# EAGLE board QlockToo (EAGLE 6.3)
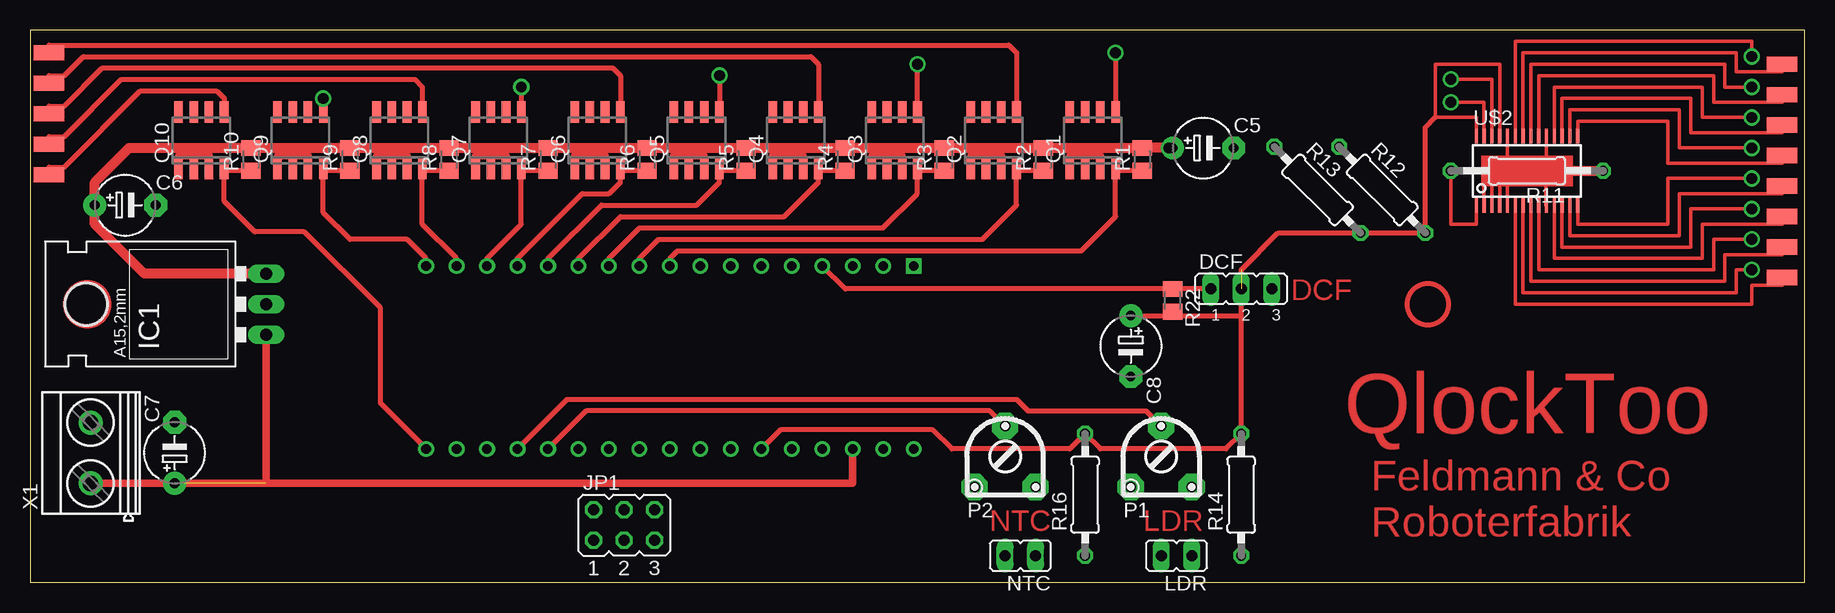
[diagram p0: board, top side]
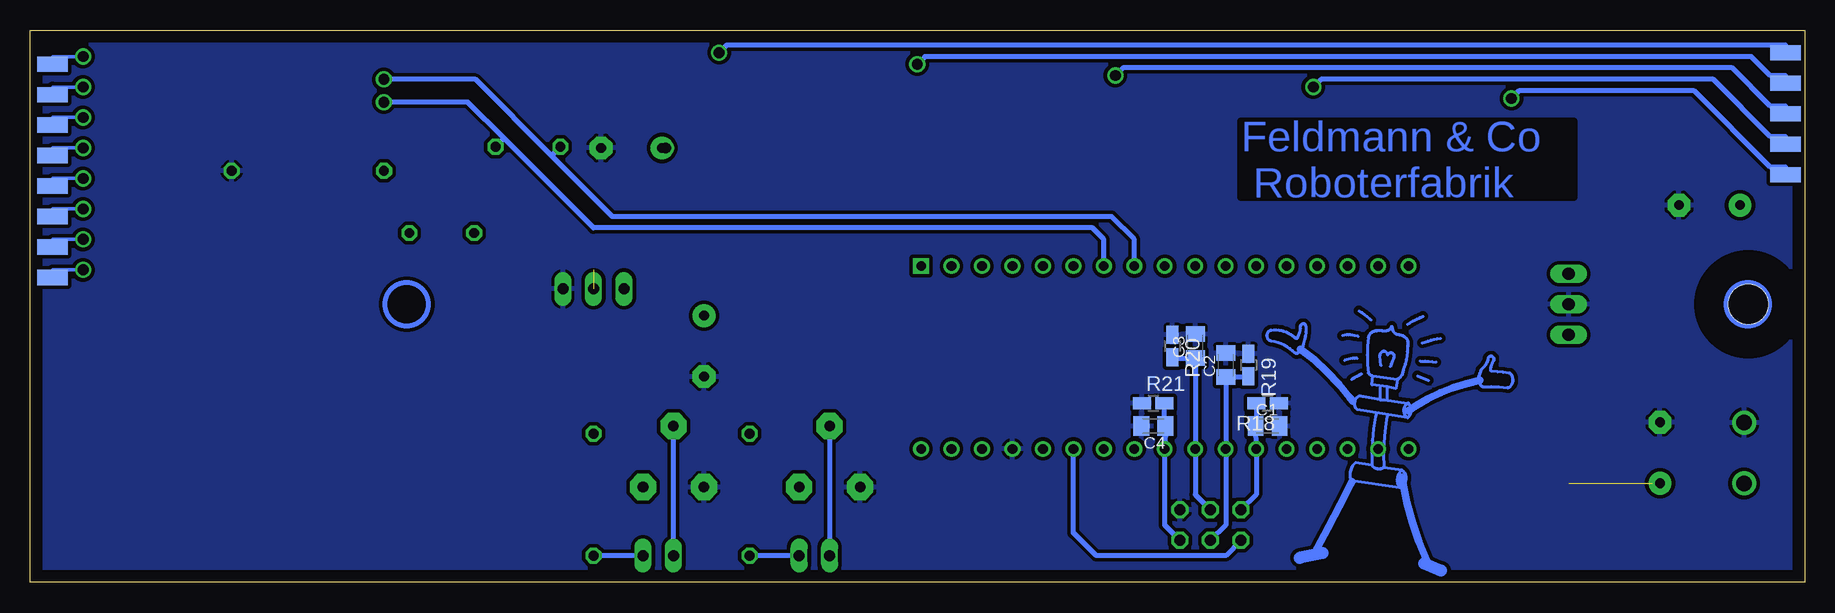
[diagram p1: board, bottom side, seen from below]

Size 147.94 x 46.02 mm. Coordinates in mm from the lower left corner, seen from the top.
Outline: 0,0 147.94,0 147.94,46.02 0,46.02 0,0
Copper layers (1*16): Top 0.035mm / dielectric 1.5mm / Bottom 0.035mm
Design rules "default": minimum track width 10mil, minimum drill 24mil, track to track 8mil, track to pad 8mil, pad to pad 8mil, via to via 8mil, smd to smd 8mil, copper to edge 40mil, drill to drill 8mil, minimum pad ring 10mil, minimum via ring 8mil, stop-mask expansion 4mil, vias tented up to drill 0mil, thermal gap 10mil

## Footprints (pad centres in the part's own frame; a part is rotated, then mirrored left to right if it is on the bottom)
C0805K = smd 1.3 x 1.6: 1 -1,0; 2 1,0
E5-5 = drill 0.813 pad 1.905: + -2.54,0 | drill 0.813 pad 1.905 octagon: - 2.54,0
JP2 = drill 0.914 long: 1 -2.54,0; 2 0,0; 3 2.54,0
78XXL = drill 1.016 long: GND 0,-3.81; IN -2.54,-3.81; OUT 2.54,-3.81 | hole 3.302: 0,11.176
JP3Q = drill 0.914 octagon: 1 -2.54,-1.27; 2 -2.54,1.27; 3 0,-1.27; 4 0,1.27; 5 2.54,-1.27; 6 2.54,1.27
JP1 = drill 0.914 long: 1 0,-1.27; 2 0,1.27
PT08N = drill 0.889 pad 2.184 octagon: 1 -2.54,-2.54; 2 2.54,-2.54; 3 0,2.54
SO08 = smd 0.72 x 1.78: 1 -1.905,-2.35; 2 -0.635,-2.35; 3 0.635,-2.35; 4 1.905,-2.35; 5 1.905,2.35; 6 0.635,2.35; 7 -0.635,2.35; 8 -1.905,2.35
M0805 = smd 1.3 x 1.6: 1 -0.95,0; 2 0.95,0
0207/12 = drill 0.813 octagon: 1 -6.35,0; 2 6.35,0
0207/10 = drill 0.813 octagon: 1 -5.08,0; 2 5.08,0
R0805W = smd 1.5 x 1: 1 -0.94,0; 2 0.94,0
ARDUINO_MICRO = drill 0.8 square: P$1 0,0 | drill 0.8: P$2 0,-2.54; P$3 0,-5.08; P$4 0,-7.62; P$5 0,-10.16; P$6 0,-12.7; P$7 0,-15.24; P$8 0,-17.78; P$9 0,-20.32; P$10 0,-22.86; P$11 0,-25.4; P$12 0,-27.94; P$13 0,-30.48; P$14 0,-33.02; P$15 0,-35.56; P$16 0,-38.1; P$17 0,-40.64; P$18 15.24,0; P$19 15.24,-2.54; P$20 15.24,-5.08; P$21 15.24,-7.62; P$22 15.24,-10.16; P$23 15.24,-12.7; P$24 15.24,-15.24; P$25 15.24,-17.78; P$26 15.24,-20.32; P$27 15.24,-22.86; P$28 15.24,-25.4; P$29 15.24,-27.94; P$30 15.24,-30.48; P$31 15.24,-33.02; P$32 15.24,-35.56; P$33 15.24,-38.1; P$34 15.24,-40.64
HTSSOP28PWP = smd 0.27 x 1.2: 1 -4.225,-2.9; 2 -3.575,-2.9; 3 -2.925,-2.9; 4 -2.275,-2.9; 5 -1.625,-2.9; 6 -0.975,-2.9; 7 -0.325,-2.9; 8 0.325,-2.9; 9 0.975,-2.9; 10 1.625,-2.9; 11 2.275,-2.9; 12 2.925,-2.9; 13 3.575,-2.9; 14 4.225,-2.9; 15 4.225,2.9; 16 3.575,2.9; 17 2.925,2.9; 18 2.275,2.9; 19 1.625,2.9; 20 0.975,2.9; 21 0.325,2.9; 22 -0.325,2.9; 23 -0.975,2.9; 24 -1.625,2.9; 25 -2.275,2.9; 26 -2.925,2.9; 27 -3.575,2.9; 28 -4.225,2.9
STIFTLEISTE_2.54_SINGLEPIN = smd 1.27 x 2.54: P$1 0,0
MKDSN1,5/2-5,08 = drill 1.3 pad 2: 1 -2.561,0.025; 2 2.519,0.025

## Placement (x,y rotation side)
C1  [C0805K]  44.77,13.02 0 bottom
C2  [C0805K]  48.26,18.1 90 bottom
C3  [C0805K]  50.8,19.68 90 bottom
C4  [C0805K]  54.29,13.02 180 bottom
C5  [E5-5]  97.79,36.2 0 top
C6  [E5-5]  7.94,31.43 0 top
C7  [E5-5]  12.06,10.79 90 top
C8  [E5-5]  91.76,19.68 270 top
DCF  [JP2]  100.97,24.45 0 top
IC1  [78XXL]  15.88,23.18 90 top
JP1  [JP3Q]  49.53,4.76 0 top
LDR  [JP1]  95.57,2.22 90 top
NTC  [JP1]  82.55,2.22 90 top
P1  [PT08N]  94.3,10.48 0 top
P2  [PT08N]  81.28,10.48 0 top
Q1  IFR7416  [SO08]  88.58,36.83 0 top
Q2  IFR7416  [SO08]  80.33,36.83 0 top
Q3  IFR7416  [SO08]  72.07,36.83 0 top
Q4  IFR7416  [SO08]  63.82,36.83 0 top
Q5  IFR7416  [SO08]  55.56,36.83 0 top
Q6  IFR7416  [SO08]  47.31,36.83 0 top
Q7  IFR7416  [SO08]  39.05,36.83 0 top
Q8  IFR7416  [SO08]  30.8,36.83 0 top
Q9  IFR7416  [SO08]  22.54,36.83 0 top
Q10  IFR7416  [SO08]  14.29,36.83 0 top
R1  [M0805]  92.71,35.24 90 top
R2  [M0805]  84.45,35.24 90 top
R3  [M0805]  76.2,35.24 90 top
R4  [M0805]  67.94,35.24 90 top
R5  [M0805]  59.69,35.24 90 top
R6  [M0805]  51.44,35.24 90 top
R7  [M0805]  43.18,35.24 90 top
R8  [M0805]  34.92,35.24 90 top
R9  [M0805]  26.67,35.24 90 top
R10  [M0805]  18.41,35.24 90 top
R11  [0207/12]  124.78,34.29 180 top
R12  [0207/10]  112.71,32.7 315 top
R13  [0207/10]  107.31,32.7 315 top
R14  [0207/10]  100.97,7.3 90 top
R16  [0207/10]  87.95,7.3 90 top
R18  [R0805W]  44.77,14.92 180 bottom
R19  [R0805W]  46.35,18.1 270 bottom
R20  [R0805W]  52.7,19.68 270 bottom
R21  [R0805W]  54.29,14.92 0 bottom
R22  [M0805]  95.25,23.5 270 top
U$1  ARDUINO_MICRO  [ARDUINO_MICRO]  73.66,26.35 270 top
U$2  TLC59116  [HTSSOP28PWP]  124.78,34.29 0 top
U$3  STIFTLEISTE_2.54_SINGLEPIN  [STIFTLEISTE_2.54_SINGLEPIN]  146.05,25.4 270 top
U$4  STIFTLEISTE_2.54_SINGLEPIN  [STIFTLEISTE_2.54_SINGLEPIN]  146.05,25.4 270 bottom
U$5  STIFTLEISTE_2.54_SINGLEPIN  [STIFTLEISTE_2.54_SINGLEPIN]  146.05,27.94 270 top
U$6  STIFTLEISTE_2.54_SINGLEPIN  [STIFTLEISTE_2.54_SINGLEPIN]  146.05,27.94 270 bottom
U$7  STIFTLEISTE_2.54_SINGLEPIN  [STIFTLEISTE_2.54_SINGLEPIN]  146.05,30.48 270 top
U$8  STIFTLEISTE_2.54_SINGLEPIN  [STIFTLEISTE_2.54_SINGLEPIN]  146.05,30.48 270 bottom
U$9  STIFTLEISTE_2.54_SINGLEPIN  [STIFTLEISTE_2.54_SINGLEPIN]  146.05,33.02 270 top
U$10  STIFTLEISTE_2.54_SINGLEPIN  [STIFTLEISTE_2.54_SINGLEPIN]  146.05,33.02 270 bottom
U$11  STIFTLEISTE_2.54_SINGLEPIN  [STIFTLEISTE_2.54_SINGLEPIN]  146.05,35.56 270 top
U$12  STIFTLEISTE_2.54_SINGLEPIN  [STIFTLEISTE_2.54_SINGLEPIN]  146.05,35.56 270 bottom
U$13  STIFTLEISTE_2.54_SINGLEPIN  [STIFTLEISTE_2.54_SINGLEPIN]  146.05,38.1 90 top
U$14  STIFTLEISTE_2.54_SINGLEPIN  [STIFTLEISTE_2.54_SINGLEPIN]  146.05,38.1 270 bottom
U$15  STIFTLEISTE_2.54_SINGLEPIN  [STIFTLEISTE_2.54_SINGLEPIN]  146.05,40.64 90 top
U$16  STIFTLEISTE_2.54_SINGLEPIN  [STIFTLEISTE_2.54_SINGLEPIN]  146.05,40.64 270 bottom
U$17  STIFTLEISTE_2.54_SINGLEPIN  [STIFTLEISTE_2.54_SINGLEPIN]  146.05,43.18 270 top
U$18  STIFTLEISTE_2.54_SINGLEPIN  [STIFTLEISTE_2.54_SINGLEPIN]  146.05,43.18 270 bottom
U$19  STIFTLEISTE_2.54_SINGLEPIN  [STIFTLEISTE_2.54_SINGLEPIN]  1.59,44.13 270 bottom
U$20  STIFTLEISTE_2.54_SINGLEPIN  [STIFTLEISTE_2.54_SINGLEPIN]  1.59,44.13 90 top
U$21  STIFTLEISTE_2.54_SINGLEPIN  [STIFTLEISTE_2.54_SINGLEPIN]  1.59,41.59 270 bottom
U$22  STIFTLEISTE_2.54_SINGLEPIN  [STIFTLEISTE_2.54_SINGLEPIN]  1.59,41.59 90 top
U$23  STIFTLEISTE_2.54_SINGLEPIN  [STIFTLEISTE_2.54_SINGLEPIN]  1.59,39.05 270 bottom
U$24  STIFTLEISTE_2.54_SINGLEPIN  [STIFTLEISTE_2.54_SINGLEPIN]  1.59,39.05 90 top
U$25  STIFTLEISTE_2.54_SINGLEPIN  [STIFTLEISTE_2.54_SINGLEPIN]  1.59,36.51 270 bottom
U$26  STIFTLEISTE_2.54_SINGLEPIN  [STIFTLEISTE_2.54_SINGLEPIN]  1.59,36.51 90 top
U$27  STIFTLEISTE_2.54_SINGLEPIN  [STIFTLEISTE_2.54_SINGLEPIN]  1.59,33.97 270 bottom
U$28  STIFTLEISTE_2.54_SINGLEPIN  [STIFTLEISTE_2.54_SINGLEPIN]  1.59,33.97 90 top
U$37  HELFERLEIN01  [HELFERLEIN01]  35.24,20.64 0 bottom
X1  MKDSN1,5/2-5,08  [MKDSN1,5/2-5,08]  5.08,10.79 90 top

## Library data of the parts
C1-C8 R1-R14 R16 R18-R22 = resistor
DCF JP1 LDR NTC = jumper
IC1 = SparkFun
P1 P2 = divers
Q1-Q10 = ir
U$1-U$28 U$37 = bastian
X1 = con-phoenix-508; MPN: MKDSN 1,5/2-5.08; OC_FARNELL: 1792903; OC_NEWARK: 30M2397

## Nets
+5V: C8.+ DCF.2 JP1.1 R12.2 R13.2 R14.2 R16.2 R22.2 U$1.P$23 U$2.25 U$2.28
E0: Q1.4 R1.1 U$1.P$9
E1: Q2.4 R2.1 U$1.P$10
E2: Q3.4 R3.1 U$1.P$11
E3: Q4.4 R4.1 U$1.P$12
E4: Q5.4 R5.1 U$1.P$13
E5: Q6.4 R6.1 U$1.P$14
E6: Q7.4 R7.1 U$1.P$15
E7: Q8.4 R8.1 U$1.P$16
E8: Q9.4 R9.1 U$1.P$17
E9: Q10.4 R10.1 U$1.P$34
GND: C1.2 C2.2 C3.2 C4.2 C5.- C6.- C7.- C8.- DCF.3 IC1.GND JP1.6 P1.1 P2.1 R11.1 R18.1 R19.1 R20.1 R21.1 U$1.P$21 U$2.2 U$2.3 U$2.4 U$2.5 U$2.10 U$2.19 U$2.24 X1.2
INT2: DCF.1 R22.1 U$1.P$4
INT3: U$1.P$3
LDR: LDR.2 P1.3 U$1.P$31
N$1: LDR.1 R14.1
N$2: Q1.5 U$19.P$1
N$3: C5.+ C6.+ IC1.OUT Q1.1 Q2.1 Q3.1 Q4.1 Q5.1 Q6.1 Q7.1 Q8.1 Q9.1 Q10.1 R1.2 R2.2 R3.2 R4.2 R5.2 R6.2 R7.2 R8.2 R9.2 R10.2
N$4: C7.+ IC1.IN U$1.P$20 X1.1
N$6: U$2.20 U$15.P$1
N$7: Q8.5 U$26.P$1
N$13: R11.2 U$2.1
N$15: NTC.1 R16.1
N$16: U$2.6 U$3.P$1
N$17: U$2.7 U$4.P$1
N$18: U$2.8 U$5.P$1
N$19: U$2.9 U$6.P$1
N$20: U$2.11 U$7.P$1
N$21: U$2.12 U$8.P$1
N$22: U$2.13 U$9.P$1
N$23: U$2.14 U$10.P$1
N$24: U$2.15 U$11.P$1
N$25: U$2.16 U$12.P$1
N$26: U$2.17 U$13.P$1
N$27: U$2.18 U$14.P$1
N$29: U$2.21 U$16.P$1
N$30: U$2.22 U$17.P$1
N$31: U$2.23 U$18.P$1
N$33: Q10.5 U$28.P$1
N$34: Q9.5 U$27.P$1
N$36: Q7.5 U$25.P$1
N$37: Q6.5 U$24.P$1
N$38: Q5.5 U$23.P$1
N$39: Q4.5 U$22.P$1
N$40: Q3.5 U$21.P$1
N$41: Q2.5 U$20.P$1
S1: C1.1 JP1.2 R18.2 U$1.P$29
S2: C2.1 JP1.3 R19.2 U$1.P$28
S3: C3.1 JP1.4 R20.2 U$1.P$27
S4: C4.1 JP1.5 R21.2 U$1.P$26
SCL: R13.1 U$1.P$8 U$2.26
SDA: R12.1 U$1.P$7 U$2.27
THERMO: NTC.2 P2.3 U$1.P$30

## Tracks (layer width: path | path; a pad name or v marks a point on that pad's centre or on a via)
+5V  (1 unrouted)
  Top 0.305: U$2.25 122.5,43.18 117.16,43.18 117.16,38.73 120.55,38.73 U$2.28
  Top 0.406: 117.16,38.73 116.31,37.88 R12.2 R13.2 104.04,29.11 100.97,26.04 100.97,22.23 | 100.97,22.23 R14.2 99.69,11.11 89.22,11.11 R16.2 86.68,11.11 76.83,11.11 75.25,12.7 62.55,12.7 U$1.P$23 | 100.97,22.23 95.57,22.23 R22.2 94.94,22.55 94.61,22.23 C8.+
  Bottom 0.406: JP1.1 48.26,2.22 59.05,2.22 60.96,4.13 U$1.P$23
E0
  Top 0.406: R1.1 90.67,34.29 Q1.4 90.49,30.48 87.63,27.62 53.98,27.62 53.34,26.99 U$1.P$9
E1
  Top 0.406: R2.1 82.42,34.29 Q2.4 82.23,31.43 79.38,28.57 52.39,28.57 50.8,26.99 U$1.P$10
E2
  Top 0.406: R3.1 74.17,34.29 Q3.4 73.98,32.38 71.12,29.53 50.8,29.53 48.26,26.99 U$1.P$11
E3
  Top 0.406: R4.1 65.91,34.29 Q4.4 65.72,33.34 62.87,30.48 49.21,30.48 45.72,26.99 U$1.P$12
E4
  Top 0.406: R5.1 57.66,34.29 Q5.4 57.47,33.34 55.56,31.43 47.62,31.43 43.18,26.99 U$1.P$13
E5
  Top 0.406: R6.1 49.4,34.29 Q6.4 49.21,33.34 48.26,32.38 46.04,32.38 40.64,26.99 U$1.P$14
E6
  Top 0.406: R7.1 41.15,34.29 Q7.4 40.96,29.84 38.1,26.99 U$1.P$15
E7
  Top 0.406: R8.1 32.89,34.29 Q8.4 32.7,29.84 35.56,26.99 U$1.P$16
E8
  Top 0.406: R9.1 24.64,34.29 Q9.4 24.45,30.8 26.67,28.57 31.43,28.57 33.02,26.99 U$1.P$17
E9
  Top 0.406: R10.1 16.38,34.29 Q10.4 16.19,31.75 18.73,29.21 22.86,29.21 29.21,22.86 29.21,14.92 U$1.P$34
GND
  Top 0.305: U$2.2 121.2,34.29 121.85,34.29 | 121.85,34.29 122.5,34.29 | 122.5,34.29 123.15,34.29 | 123.15,34.29 126.36,34.29 | 126.36,34.29 126.36,31.39 U$2.10 | U$2.3 121.85,34.29 | U$2.4 122.5,34.29 | U$2.5 123.15,34.29 | U$2.24 123.15,34.29 | U$2.19 126.4,34.29 126.36,34.29
  Top 0.813: 126.36,34.29 R11.1
  pour Bottom (isolate 0.305): 0,46.04 147.96,46.04 147.96,0 0,0
INT2
  Top 0.406: DCF.1 R22.1 67.94,24.45 U$1.P$4
LDR
  Top 0.406: U$1.P$31 44.77,15.24 82.23,15.24 83.19,14.29 93.03,14.29 P1.3
  Bottom 0.406: LDR.2 P1.3
N$1
  Bottom 0.406: LDR.1 R14.1
N$2  (via drill 0.9)
  Top 0.406: v90.49,44.13 Q1.5
  Bottom 0.406: U$19.P$1 1.59,44.77 89.85,44.77 v90.49,44.13
N$3  (via drill 0.9)
  Top 0.61: Q10.1 12.38,35.56 13.65,35.56 | 14.92,34.92 14.92,35.56 13.65,35.56 | 13.65,35.56 13.65,36.2 | Q9.1 20.64,35.56 21.91,35.56 | 23.18,34.92 23.18,35.56 21.91,35.56 | 21.91,35.56 21.91,36.19 | Q8.1 28.89,35.56 30.16,35.56 | 31.43,34.92 31.43,35.56 30.16,35.56 | 30.16,35.56 30.16,36.19 | Q7.1 37.15,35.56 38.42,35.56 | 39.69,34.92 39.69,35.56 38.42,35.56 | 38.42,35.56 38.42,36.19 | Q6.1 45.4,35.56 46.67,35.56 | 47.94,34.92 47.94,35.56 46.67,35.56 | 46.67,35.56 46.67,36.19 | Q5.1 53.66,35.56 54.93,35.56 | 56.2,34.92 56.2,35.56 54.93,35.56 | 54.93,35.56 54.93,36.19 | Q4.1 61.91,35.56 63.5,35.56 | 64.45,34.92 64.45,35.56 63.5,35.56 | 63.5,35.56 63.5,36.19 | Q3.1 70.17,35.56 71.44,35.56 | 72.71,34.92 72.71,35.56 71.44,35.56 | 71.44,35.56 71.44,36.19 | Q2.1 78.42,35.56 80.33,35.56 | 80.96,34.92 80.96,35.56 80.33,35.56 | 80.33,35.56 80.33,36.19 | Q1.1 86.68,35.56 87.95,35.56 | 89.22,34.92 89.22,35.56 87.95,35.56 | 87.95,35.56 87.95,36.19
  Top 0.813: IC1.OUT 9.53,25.72 5.4,29.84 C6.+ 5.4,33.34 8.26,36.2 13.65,36.2 R10.2 21.91,36.19 R9.2 30.16,36.19 R8.2 38.42,36.19 R7.2 46.67,36.19 R6.2 54.93,36.19 R5.2 63.5,36.19 R4.2 71.44,36.19 R3.2 80.33,36.19 R2.2 87.95,36.19 90.8,36.19 90.81,36.2 R1.2 v94.93,36.19 v94.93,36.2
  Bottom 0.813: C5.+ v94.93,36.2
N$4  (1 unrouted)
  Top 0.61: IC1.IN 19.68,8.26 20,8.26 | 20,8.26 68.58,8.26 U$1.P$20 | X1.1 19.98,8.23 20,8.26
  Bottom 0.406: C7.+ 12.06,8.23 12.7,8.23
N$6
  Top 0.305: U$15.P$1 146.05,40.01 140.34,40.01 140.34,42.23 125.75,42.23 U$2.20
N$7
  Top 0.406: U$26.P$1 1.59,37.15 2.86,37.15 7.62,41.91 32.07,41.91 32.7,41.27 Q8.5
N$13
  Top 0.305: R11.2 118.43,29.84 120.55,29.84 U$2.1
N$15
  Bottom 0.406: NTC.1 R16.1
N$16
  Top 0.305: U$3.P$1 146.05,24.77 143.51,24.77 143.51,23.18 123.8,23.18 U$2.6
N$17  (via drill 0.9)
  Top 0.305: v143.51,26.04 142.24,26.04 142.24,24.13 124.45,24.13 U$2.7
  Bottom 0.305: U$4.P$1 146.05,26.04 v143.51,26.04
N$18
  Top 0.305: U$5.P$1 146.05,27.3 141.29,27.3 141.29,25.08 125.1,25.08 U$2.8
N$19  (via drill 0.9)
  Top 0.305: v143.51,28.57 140.34,28.57 140.34,26.04 125.75,26.04 U$2.9
  Bottom 0.305: U$6.P$1 146.05,28.57 v143.51,28.57
N$20
  Top 0.305: U$7.P$1 146.05,29.84 139.38,29.84 139.38,26.99 127.05,26.99 U$2.11
N$21  (via drill 0.9)
  Top 0.305: v143.51,31.11 138.43,31.11 138.43,27.94 127.7,27.94 U$2.12
  Bottom 0.305: U$8.P$1 146.05,31.11 v143.51,31.11
N$22
  Top 0.305: U$9.P$1 146.05,32.38 137.48,32.38 137.48,28.89 128.35,28.89 U$2.13
N$23  (via drill 0.9)
  Top 0.305: v143.51,33.66 136.53,33.66 136.53,29.84 129,29.84 U$2.14
  Bottom 0.305: U$10.P$1 146.05,33.66 v143.51,33.66
N$24
  Top 0.305: U$11.P$1 146.05,34.92 136.53,34.92 136.53,38.42 129,38.42 U$2.15
N$25  (via drill 0.9)
  Top 0.305: v143.51,36.2 137.48,36.2 137.48,39.37 128.35,39.37 U$2.16
  Bottom 0.305: U$12.P$1 146.05,36.2 v143.51,36.2
N$26
  Top 0.305: U$13.P$1 146.05,37.47 138.43,37.47 138.43,40.32 127.7,40.32 U$2.17
N$27  (via drill 0.9)
  Top 0.305: v143.51,38.73 139.38,38.73 139.38,41.27 127.05,41.27 U$2.18
  Bottom 0.305: U$14.P$1 146.05,38.73 v143.51,38.73
N$29  (via drill 0.9)
  Top 0.305: v143.51,41.27 141.29,41.27 141.29,43.18 125.1,43.18 U$2.21
  Bottom 0.305: U$16.P$1 146.05,41.27 v143.51,41.27
N$30
  Top 0.305: U$17.P$1 146.05,42.55 142.24,42.55 142.24,44.13 124.45,44.13 U$2.22
N$31  (via drill 0.9)
  Top 0.305: v143.51,43.81 143.51,45.09 123.8,45.09 U$2.23
  Bottom 0.305: U$18.P$1 146.05,43.81 v143.51,43.81
N$33
  Top 0.406: U$28.P$1 1.59,34.61 2.86,34.61 9.21,40.96 15.56,40.96 16.19,40.32 Q10.5
N$34  (via drill 0.9)
  Top 0.406: v24.45,40.32 Q9.5
  Bottom 0.406: U$27.P$1 1.59,34.61 2.86,34.61 9.21,40.96 23.81,40.96 v24.45,40.32
N$36  (via drill 0.9)
  Top 0.406: v40.96,41.27 Q7.5
  Bottom 0.406: U$25.P$1 1.59,37.15 2.86,37.15 7.62,41.91 40.32,41.91 v40.96,41.27
N$37
  Top 0.406: U$24.P$1 1.59,39.69 2.86,39.69 6.03,42.86 48.58,42.86 49.21,42.23 Q6.5
N$38  (via drill 0.9)
  Top 0.406: v57.47,42.23 Q5.5
  Bottom 0.406: U$23.P$1 1.59,39.69 2.86,39.69 6.03,42.86 56.83,42.86 v57.47,42.23
N$39
  Top 0.406: U$22.P$1 1.59,42.23 2.86,42.23 4.45,43.81 65.09,43.81 65.72,43.18 Q4.5
N$40  (via drill 0.9)
  Top 0.406: Q3.5 v73.98,43.18
  Bottom 0.406: U$21.P$1 1.59,42.23 2.86,42.23 4.45,43.81 73.34,43.81 v73.98,43.18
N$41
  Top 0.406: U$20.P$1 1.59,44.77 81.6,44.77 82.23,44.13 Q2.5
S1
  Bottom 0.406: R18.2 45.71,13.34 C1.1 U$1.P$29 45.72,7.3 JP1.2
S2
  Bottom 0.406: R19.2 46.35,17.1 C2.1 U$1.P$28 48.26,4.76 JP1.3
S3
  Bottom 0.406: R20.2 52.7,18.68 C3.1 U$1.P$27 50.8,7.3 JP1.4
S4
  Bottom 0.406: C4.1 U$1.P$26 | U$1.P$26 R21.2 | JP1.5 53.34,4.76 U$1.P$26
SCL  (via drill 0.9)
  Top 0.305: U$2.26 121.85,41.91 v118.43,41.91
  Bottom 0.305: v118.43,41.91 115.57,41.91
  Bottom 0.406: U$1.P$8 55.88,28.57 57.78,30.48 99.38,30.48 104.46,35.56 | 104.46,35.56 110.81,41.91 v118.43,41.91 | R13.1 | R13.1 104.46,35.56
SDA  (via drill 0.9)
  Top 0.305: U$2.27 121.2,40.01 v118.43,40.01
  Bottom 0.406: U$1.P$7 58.42,28.57 59.37,29.53 100.97,29.53 108.43,36.99 | 108.43,36.99 111.44,40.01 v118.43,40.01 | R12.1 | R12.1 108.43,36.99
THERMO
  Top 0.406: P2.3 80.01,14.29 46.35,14.29 U$1.P$30
  Bottom 0.406: P2.3 NTC.2
(copper drawn outside any net)
  shapes: Bottom circle x2, Top circle x2

## Text on the board
Top: DCF | QlockToo | NTC | LDR | Feldmann & Co / Roboterfabrik
Bottom: Feldmann & Co / Roboterfabrik